# Altium PCB BuySellDisplay4.PcbDoc (part 2 of 3)
Units mm, origin at the board's own origin, x right, y up, seen from the top; angles counter-clockwise.
Board outline 355.85 x 151.13 mm, 2 copper layers (Top Layer, Bottom Layer); 219 components, 209 nets, 584 pads, 68 vias.
Unrouted connection lines stored in the file: 3.
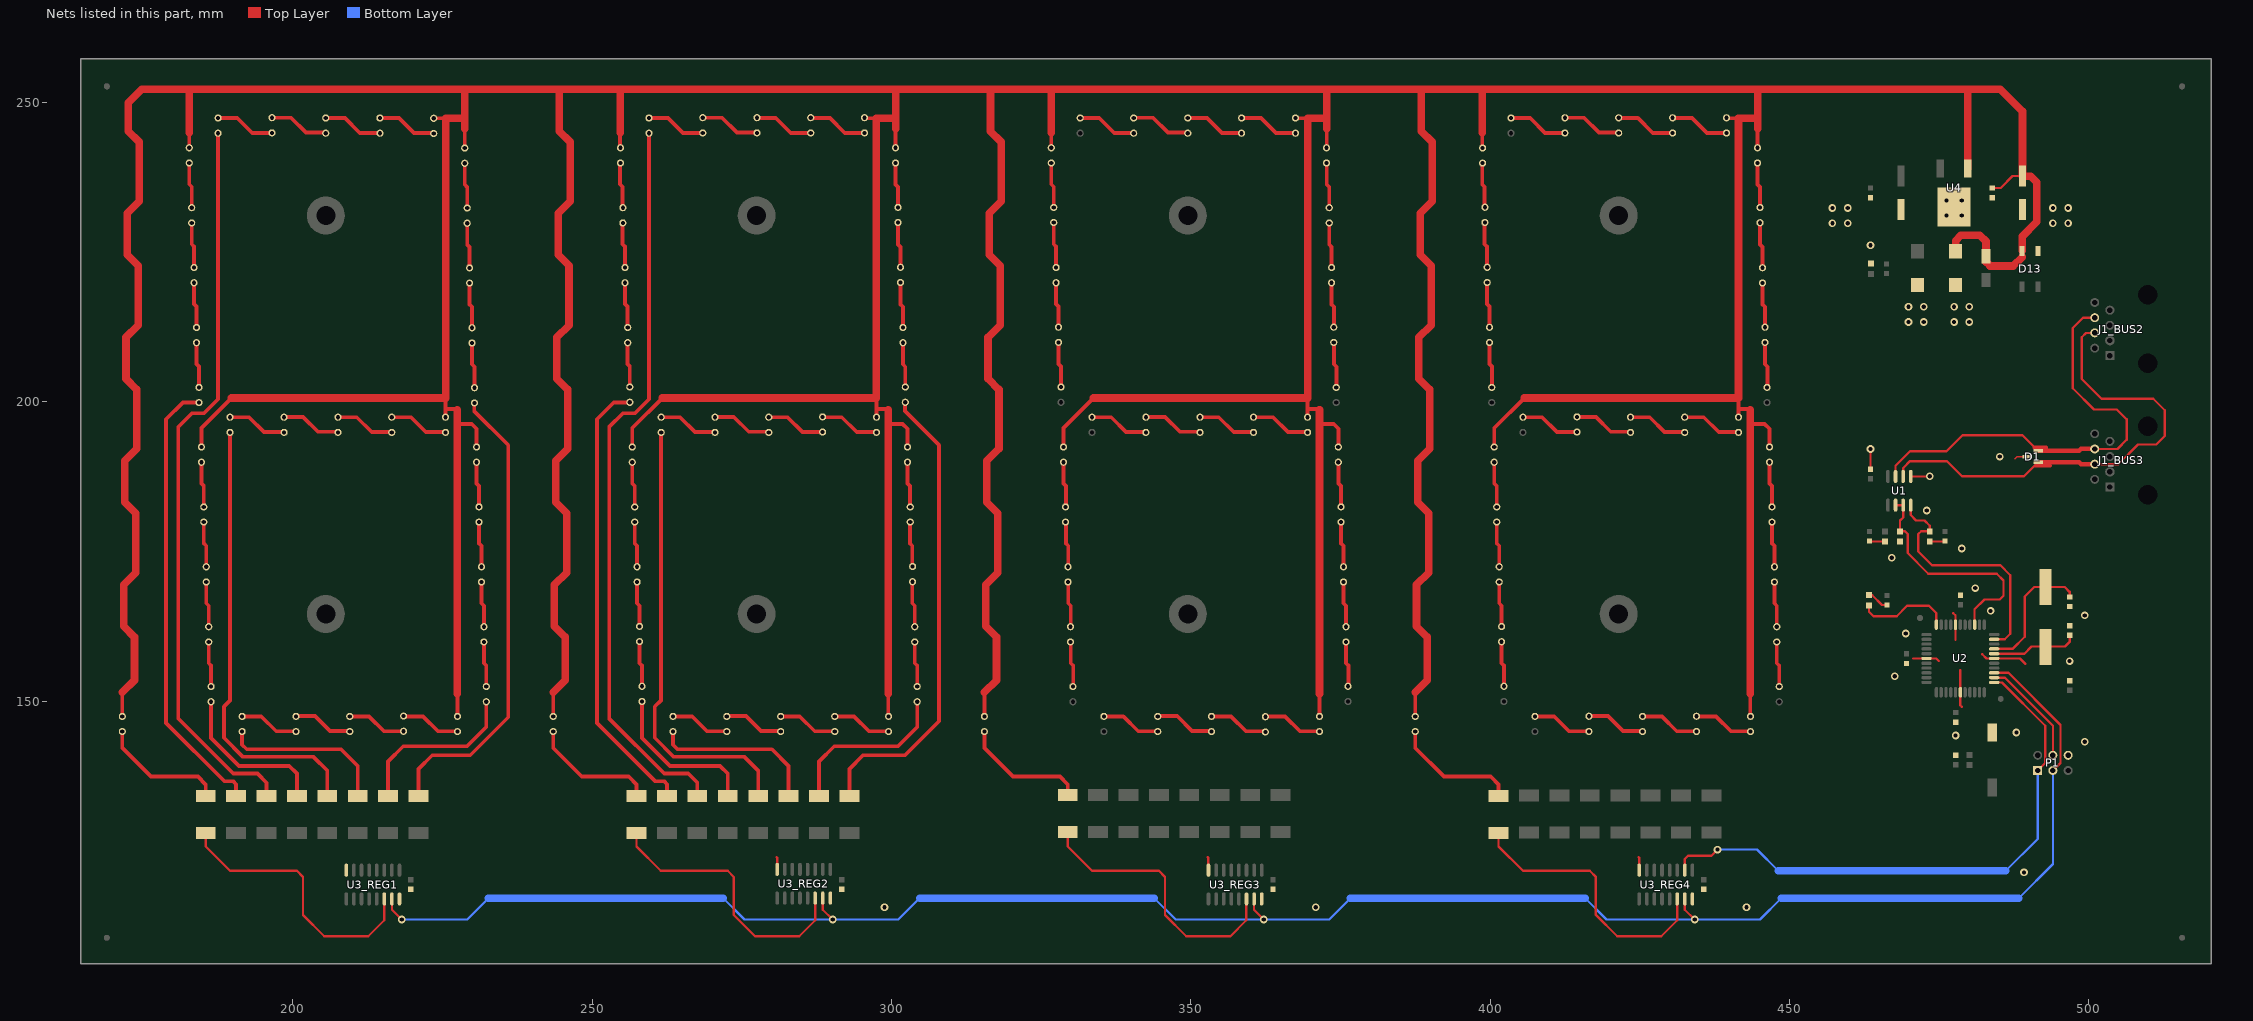
[diagram p2: the nets of this part, all layers, seen from the top]

## Part data
C1 C2 C4 C5 C6 C7 C9_REG1 C9_REG2 C9_REG3 C9_REG4 C12 C13: library part C0.1UF, "Capacitores cerámicos de capas múltiples (MLCC) - SMD/SMT 0603 0.1uF 16volts X7R 5%"
C3 C8: library part C18pF, "GJM0336C1E180JB01D"
C10: library part EEH-ZA1E101XP, "EEH-ZA1E101XP"
C11: library part 25SVPF47M, "25SVPF47M"
D1: library part SM712, "SM712"
D2 D3 D4 D14: library part 150060YS75000, "NPN General Purpose Amplifier"
D6_7SEG1 D6_7SEG2 D6_7SEG3 D6_7SEG4 D7_L1 D7_L2 D7_L3 D7_L4 D7_L5 D7_L6 D7_L7 D7_L8 D7_L9 D7_L10 D7_L11 D7_L12 D7_L13 D7_L14 D7_L15 D7_L16 D7_L17 D7_L18 D7_L19 D7_L20 D7_L21 D7_L22 D7_L23 D7_L24 D7_L25 D7_L26 D7_L27 D7_L28 D8_L1 D8_L2 D8_L3 D8_L4 D8_L5 D8_L6 D8_L7 D8_L8 D8_L9 D8_L10 D8_L11 D8_L12 D8_L13 D8_L14 D8_L15 D8_L16 D8_L17 D8_L18 D8_L19 D8_L20 D8_L21 D8_L22 D8_L23 D8_L24 D8_L25 D8_L26 D8_L27 D8_L28 D9_L1 D9_L2 D9_L3 D9_L4 D9_L5 D9_L6 D9_L7 D9_L8 D9_L9 D9_L10 D9_L11 D9_L12 D9_L13 D9_L14 D9_L15 D9_L16 D9_L17 D9_L18 D9_L19 D9_L20 D9_L21 D9_L22 D9_L23 D9_L24 D9_L25 D9_L26 D9_L27 D9_L28 D10_L1 D10_L2 D10_L3 D10_L4 D10_L5 D10_L6 D10_L7 D10_L8 D10_L9 D10_L10 D10_L11 D10_L12 D10_L13 D10_L14 D10_L15 D10_L16 D10_L17 D10_L18 D10_L19 D10_L20 D10_L21 D10_L22 D10_L23 D10_L24 D10_L25 D10_L26 D10_L27 D10_L28 D11_L1 D11_L2 D11_L3 D11_L4 D11_L5 D11_L6 D11_L7 D11_L8 D11_L9 D11_L10 D11_L11 D11_L12 D11_L13 D11_L14 D11_L15 D11_L16 D11_L17 D11_L18 D11_L19 D11_L20 D11_L21 D11_L22 D11_L23 D11_L24 D11_L25 D11_L26 D11_L27 D11_L28: library part HBLED, "HBLED"
D15: library part SMBJ12A-E3/52, "NPN General Purpose Amplifier"
D16: library part SMBJ5.0A, "NPN General Purpose Amplifier"
J1_BUS2 J1_BUS3: library part 15-43-6233, "Right Angle, Standard Profile, RJ45-Keyed, Flange Mount PCB Jack"
P1: library part "Header 6", "Header, 6-Pin"
R1 R2 R3 R4 R5 R8: library part RK73B1HTTC472J, "RK73B1HTTC472J"
R6_7SEG1 R6_7SEG2 R6_7SEG3 R6_7SEG4: library part CRCW2512470RJNEG, "CRCW2512470RJNEG"
R7_L1 R7_L2 R7_L3 R7_L4 R7_L5 R7_L6 R7_L7 R7_L8 R7_L9 R7_L10 R7_L11 R7_L12 R7_L13 R7_L14 R7_L15 R7_L16 R7_L17 R7_L18 R7_L19 R7_L20 R7_L21 R7_L22 R7_L23 R7_L24 R7_L25 R7_L26 R7_L27 R7_L28: library part CRCW2512120RJNEG, "CRCW2512120RJNEG"
S1: "Switch"
U1: "Low-Power, Slew-Rate-Limited RS-485/RS-422 Transceiver"
U2: "20 MHz 8-bit AVR Microcontroller with 128KB Flash, 44-Pin TQFP Pkg, Industrial Temp"
U3_REG1 U3_REG2 U3_REG3 U3_REG4: library part NPIC6C595, "Power logic 8-bit shift register; open-drain outputs"
Y1: "Crystal Oscillator"

## Free pads (board coordinates)
  round 6.35 hole 3.175: 0(205.486,164.592) 0(205.486,231.14) 0(277.47,164.592) 0(277.47,231.14) 0(349.504,164.592) 0(349.504,231.14) 0(421.488,164.592) 0(421.488,231.14)
  round 1 smd mask+1: 1(168.91,110.49) 1(168.91,252.73) 1(515.62,110.49) 1(515.62,252.73)
  round 1 smd far side mask+1: 1(168.91,110.49) 1(168.91,252.73) 1(515.62,110.49) 1(515.62,252.73)
  round 1 smd mask+0.75: 1(471.83,163.906) 1(485.318,150.393)

## Via types
v1: diameter 1.27, hole 0.711, Top Layer to Bottom Layer, 68 vias

## Nets (pads, with @x,y where several pads share a name; then routed paths per layer and width w, separated by ;. In a path a pad name is that pad's centre, name@x,y a point inside that pad or via, vN(x,y) a via of type N, cw(c..) or ccw(c..) an arc to the next point about the centre after c; other vN are vias at no path point)
20MHZ_1: C3.1 U2.8 Y1.2 | length 22
  Top Layer w0.381: U2.8@484.214,158.751 487.3,158.751 489.331,160.782 489.331,167.513 490.902,169.084 496.015,169.084 496.824,168.275 C3.1@496.824,167.424
20MHZ_2: C8.1 U2.7 Y1.1 | length 14.3
  Top Layer w0.381: U2.7@484.214,157.951 489.294,157.951 490.474,159.131 492.76,159.131 496.062,159.131 496.824,159.893 C8.1@496.824,160.744
A: D1.1 J1_BUS2.4 J1_BUS3.4 U1.6 | length 81.5
  Top Layer w0.381: U1.6@469.011,187.566 469.011,188.976 470.154,190.119 476.305,190.119 478.845,187.579 489.204,187.579 D1.1@491.556,189.931 ; J1_BUS2.4@500.706,211.541 499.577,211.541 498.856,210.82 498.856,203.835 502.158,200.533 510.794,200.533 512.699,198.628 512.699,194.31 511.302,192.913 508.254,192.913 504.952,189.611 J1_BUS3.4@500.962,189.611
  Top Layer w0.635: 491.109,189.357 493.522,189.357
  Top Layer w0.762: D1.1@491.556,189.931 498.41,189.931 498.73,189.611 J1_BUS3.4@500.962,189.611
B: D1.2 J1_BUS2.6 J1_BUS3.6 U1.7 | length 74.2
  Top Layer w0.381: U1.7@467.741,187.566 467.741,189.357 470.154,191.77 476.25,191.77 478.917,194.437 488.95,194.437 490.982,192.405 ; J1_BUS2.6@500.706,214.081 499.069,214.081 497.332,212.344 497.332,202.311 500.888,198.755 504.698,198.755 506.349,197.104 506.349,193.675 504.825,192.151 J1_BUS3.6@501.015,192.151
  Top Layer w0.635: 490.982,192.405 492.887,192.405
  Top Layer w0.762: D1.2@491.556,191.831 498.409,191.831 498.729,192.151 J1_BUS3.6@501.015,192.151
CLK: P1.3 U2.3 U3_REG1.15 U3_REG2.15 U3_REG3.15 U3_REG4.15 | length 343.4
  Top Layer w0.381: U3_REG1.15@216.535,116.98 216.535,115.189 v1(218.186,113.538) ; U3_REG2.15@288.519,116.98 288.519,115.189 v1(290.17,113.538) ; U3_REG3.15@360.553,116.98 360.553,115.189 v1(362.204,113.538) ; U3_REG4.15@432.537,116.98 432.537,115.189 v1(434.188,113.538) ; U2.3@484.214,154.751 486.599,154.751 495.3,146.05 495.3,139.7 P1.3@494.03,138.43
  Bottom Layer w0.381: v1(218.186,113.538) 229.108,113.538 232.664,117.094 ; 271.882,117.094 275.438,113.538 ; 275.488,113.538 301.142,113.538 304.698,117.094 ; 343.916,117.094 347.472,113.538 373.126,113.538 376.682,117.094 ; 415.9,117.094 419.456,113.538 445.11,113.538 448.666,117.094 ; 488.315,117.094 494.03,122.809 P1.3@494.03,138.43
  Bottom Layer w1.27: 232.664,117.094 271.882,117.094 ; 304.698,117.094 343.916,117.094 ; 376.682,117.094 415.9,117.094 ; 448.666,117.094 488.315,117.094
COM_485_EN: R1.1 U1.2 U1.3 U2.14 | length 39.3
  Top Layer w0.381: U1.2@467.741,182.766 U1.3@469.011,182.766 469.011,180.721 468.503,180.213 R1.1@468.503,178.396 469.304,178.396 469.773,177.927 469.773,174.752 473.202,171.323 484.632,171.323 485.775,170.18 485.775,167.64 485.14,167.005 482.6,167.005 480.949,165.354 U2.14@480.949,162.801
DI: R3.2 U1.4 U2.10 | length 41.4
  Top Layer w0.381: U1.4@470.281,182.766 470.281,181.102 471.17,180.213 472.567,180.213 473.456,179.324 R3.2@473.456,178.396 472.02,178.396 471.551,177.927 471.551,175.006 473.837,172.72 485.267,172.72 486.918,171.069 486.918,161.29 485.979,160.351 U2.10@484.214,160.351
DOT_7SEG1: R6_7SEG1.2 U3_REG1.14 | length 46.7
  Top Layer w0.381: R6_7SEG1.2@185.42,127.964 185.42,125.73 189.484,121.666 200.66,121.666 201.676,120.65 201.676,114.3 205.232,110.744 212.598,110.744 215.265,113.411 U3_REG1.14@215.265,116.98
DOT_7SEG2: R6_7SEG2.2 U3_REG2.14 | length 46.7
  Top Layer w0.381: R6_7SEG2.2@257.404,127.964 257.404,125.73 261.468,121.666 272.644,121.666 273.66,120.65 273.66,114.3 277.216,110.744 284.582,110.744 287.249,113.411 U3_REG2.14@287.249,116.98
DOT_7SEG3: R6_7SEG3.2 U3_REG3.14 | length 46.7
  Top Layer w0.381: R6_7SEG3.2@329.438,127.964 329.438,125.73 333.502,121.666 344.678,121.666 345.694,120.65 345.694,114.3 349.25,110.744 356.616,110.744 359.283,113.411 U3_REG3.14@359.283,116.98
DOT_7SEG4: R6_7SEG4.2 U3_REG4.14 | length 46.7
  Top Layer w0.381: R6_7SEG4.2@401.422,127.964 401.422,125.73 405.486,121.666 416.662,121.666 417.678,120.65 417.678,114.3 421.234,110.744 428.6,110.744 431.267,113.411 U3_REG4.14@431.267,116.98
EXTSUPP: C10.1 C12.1 D6_7SEG1.A D6_7SEG2.A D6_7SEG3.A D6_7SEG4.A D7_L1.A D7_L2.A D7_L3.A D7_L4.A D7_L5.A D7_L6.A D7_L7.A D7_L8.A D7_L9.A D7_L10.A D7_L11.A D7_L12.A D7_L13.A D7_L14.A D7_L15.A D7_L16.A D7_L17.A D7_L18.A D7_L19.A D7_L20.A D7_L21.A D7_L22.A D7_L23.A D7_L24.A D7_L25.A D7_L26.A D7_L27.A D7_L28.A D12.1 D13.4 D15.1 U4.1 | length 1561.9
  Top Layer w0.381: C12.1@483.87,235.75 485.305,235.75 487.299,237.744 C10.1@488.95,237.744
  Top Layer w0.635: D6_7SEG1.A@171.501,147.472 171.501,151.486 ; D7_L5.A@182.677,242.468 182.677,245.059 ; 182.677,251.511 183.388,252.222 ; D7_L3.A@184.709,192.481 184.709,195.631 189.738,200.66 ; D7_L7.A@223.52,247.396 225.552,247.396 ; D7_L4.A@225.501,197.46 225.501,202.032 ; 225.501,198.831 227.533,198.831 ; D7_L1.A@227.482,147.472 227.482,152.044 ; 227.482,196.342 229.87,196.342 230.683,195.529 D7_L2.A@230.683,192.481 ; D7_L6.A@228.702,242.418 228.702,245.618 ; D6_7SEG2.A@243.484,147.472 243.484,151.486 ; D7_L12.A@254.66,242.468 254.66,245.059 ; 254.66,251.511 255.372,252.222 ; D7_L10.A@256.692,192.481 256.692,195.631 261.722,200.66 ; D7_L14.A@295.504,247.396 297.536,247.396 ; D7_L11.A@297.485,197.46 297.485,202.032 ; 297.485,198.831 299.517,198.831 ; D7_L8.A@299.466,147.472 299.466,152.044 ; 299.466,196.342 301.854,196.342 302.666,195.529 D7_L9.A@302.666,192.481 ; D7_L13.A@300.685,242.418 300.685,245.618 ; D6_7SEG3.A@315.519,147.472 315.519,151.486 ; D7_L19.A@326.695,242.468 326.695,245.059 ; 326.695,251.511 327.406,252.222 ; D7_L17.A@328.727,192.481 328.727,195.631 333.756,200.66 ; D7_L21.A@367.538,247.396 369.57,247.396 ; D7_L18.A@369.519,197.46 369.519,202.032 ; 369.519,198.831 371.551,198.831 ; D7_L15.A@371.5,147.472 371.5,152.044 ; 371.5,196.342 373.888,196.342 374.701,195.529 D7_L16.A@374.701,192.481 ; D7_L20.A@372.72,242.418 372.72,245.618 ; D6_7SEG4.A@387.502,147.472 387.502,151.486 ; D7_L26.A@398.678,242.468 398.678,245.059 ; 398.678,251.511 399.39,252.222 ; D7_L24.A@400.71,192.481 400.71,195.631 405.74,200.66 ; D7_L28.A@439.522,247.396 441.554,247.396 ; D7_L25.A@441.503,197.46 441.503,202.032 ; 441.503,198.831 443.535,198.831 ; D7_L22.A@443.484,147.472 443.484,152.044 ; 443.484,196.342 445.872,196.342 446.684,195.529 D7_L23.A@446.684,192.481 ; D7_L27.A@444.703,242.418 444.703,245.618
  Top Layer w1.27: 171.501,151.486 173.533,153.518 173.533,160.731 171.704,162.56 171.704,169.469 173.736,171.501 173.736,181.407 171.907,183.236 171.907,190.144 173.939,192.176 173.939,202.082 172.11,203.911 172.11,210.82 174.142,212.852 174.142,222.758 172.314,224.587 172.314,231.496 174.346,233.528 174.346,243.434 172.517,245.262 172.517,249.987 174.752,252.222 485.267,252.222 488.95,248.539 C10.1@488.95,237.871 ; 182.677,245.008 182.677,251.511 ; 189.738,200.66 225.501,200.66 ; 225.501,200.762 225.501,247.396 228.651,247.396 ; 227.482,151.282 227.482,198.73 ; 228.702,245.618 228.702,252.222 ; 243.484,151.486 245.516,153.518 245.516,160.731 243.688,162.56 243.688,169.469 245.72,171.501 245.72,181.407 243.891,183.236 243.891,190.144 245.923,192.176 245.923,202.082 244.094,203.911 244.094,210.82 246.126,212.852 246.126,222.758 244.297,224.587 244.297,231.496 246.329,233.528 246.329,243.434 244.5,245.262 244.5,252.171 ; 254.66,245.008 254.66,251.511 ; 261.722,200.66 297.485,200.66 ; 297.485,200.762 297.485,247.396 300.634,247.396 ; 299.466,151.282 299.466,198.73 ; 300.685,245.618 300.685,252.222 ; 315.519,151.486 317.551,153.518 317.551,160.731 315.722,162.56 315.722,169.469 317.754,171.501 317.754,181.407 315.925,183.236 315.925,190.144 317.957,192.176 317.957,202.082 316.128,203.911 316.128,210.82 318.16,212.852 318.16,222.758 316.332,224.587 316.332,231.496 318.364,233.528 318.364,243.434 316.535,245.262 316.535,252.171 ; 326.695,245.008 326.695,251.511 ; 333.756,200.66 369.519,200.66 ; 369.519,200.762 369.519,247.396 372.669,247.396 ; 371.5,151.282 371.5,198.73 ; 372.72,245.618 372.72,252.222 ; 387.502,151.486 389.534,153.518 389.534,160.731 387.706,162.56 387.706,169.469 389.738,171.501 389.738,181.407 387.909,183.236 387.909,190.144 389.941,192.176 389.941,202.082 388.112,203.911 388.112,210.82 390.144,212.852 390.144,222.758 388.315,224.587 388.315,231.496 390.347,233.528 390.347,243.434 388.518,245.262 388.518,252.171 ; 398.678,245.008 398.678,251.511 ; 405.74,200.66 441.503,200.66 ; 441.503,200.762 441.503,247.396 444.652,247.396 ; 443.484,151.282 443.484,198.73 ; 444.703,245.618 444.703,252.222 ; D15.1@477.774,225.177 477.774,226.949 478.663,227.838 481.838,227.838 482.854,226.822 482.854,223.393 483.527,222.72 487.388,222.72 488.885,224.217 ; 479.806,251.714 U4.1@479.81,239 ; D13.4@488.885,225.25 488.885,227.646 491.363,230.124 491.363,236.728 490.347,237.744 C10.1@488.95,237.744
GND: C1.2 C2.2 C3.2 C4.2 C5.2 C6.2 C7.2 C8.2 C9_REG1.2 C9_REG2.2 C9_REG3.2 C9_REG4.2 C10.2 C11.2 C12.2 C13.2 D1.3 D13.3 D15.2 D16.2 P1.6 R1.2 R8.2 S1.2 U1.5 U2.6 U2.18 U2.28 U2.39 U3_REG1.8 U3_REG1.16 U3_REG2.8 U3_REG2.16 U3_REG3.8 U3_REG3.16 U3_REG4.8 U3_REG4.16 U4.4 | length 38.7
  Top Layer w0.254: 487.68,190.5 488.061,190.881 D1.3@489.756,190.881
  Top Layer w0.381: 280.797,123.952 280.899,123.85 U3_REG2.8@280.899,121.78 ; 352.831,123.952 352.933,123.85 U3_REG3.8@352.933,121.78 ; 424.815,123.952 424.917,123.85 U3_REG4.8@424.917,121.78 ; C1.2@463.55,188.76 v1(463.55,192.151) ; U1.5@470.281,187.566 v1@473.456,187.566 ; 470.662,157.151 474.547,157.151 474.98,156.718 ; 477.393,164.719 477.754,164.358 477.754,160.254 ; 478.564,155.194 478.564,149.324 478.79,149.098 ; 482.219,157.861 482.929,157.151 488.517,157.151 489.458,156.21
  other v1: 298.831,115.57 370.865,115.57 442.849,115.57 489.204,121.412 499.364,143.256 477.774,144.272 487.934,144.78 467.614,154.178 496.824,156.718 469.468,161.315 499.364,164.338 483.616,165.1 481.076,168.91 467.106,173.99 478.79,175.514 472.948,181.864 473.456,187.579 485.14,190.881 469.9,213.36 472.44,213.36 477.52,213.36 480.06,213.36 469.9,215.9 472.44,215.9 477.52,215.9 480.06,215.9 463.55,226.187 457.2,229.87 459.74,229.87 494.03,229.87 496.57,229.87 476.25,231.14 478.79,231.14 457.2,232.41 459.74,232.41 494.03,232.41 496.57,232.41 476.25,233.68 478.79,233.68
IND: R5.1 U2.22 | length 15.8
  Top Layer w0.381: R5.1@463.296,166.028 463.296,164.973 464.058,164.211 467.944,164.211 469.671,165.938 473.329,165.938 474.564,164.703 U2.22@474.564,162.801
INPUT: P1.1 U2.1 U3_REG4.2 | length 96.2
  Top Layer w0.381: U3_REG4.2@432.537,121.78 432.537,123.658 433.084,124.206 436.982,124.206 v1(437.998,125.222) ; U2.1@484.214,153.151 485.532,153.151 492.76,145.923 492.76,139.7 P1.1@491.49,138.43
  Bottom Layer w0.381: v1(437.998,125.222) 444.602,125.222 448.158,121.666 ; 486.156,121.666 491.49,127 P1.1@491.49,138.43
  Bottom Layer w1.27: 448.158,121.666 486.156,121.666
MISO: P1.4 U2.2 | length 18.1
  Top Layer w0.381: U2.2@484.214,153.951 486.002,153.951 494.03,145.923 P1.4@494.03,140.97
NetD2_1: D2.1 R2.1 | length 2.5
  Top Layer w0.381: D2.1@463.473,176.696 R2.1@465.963,176.696
NetD3_1: D3.1 R3.1 | length 2.5
  Top Layer w0.381: R3.1@473.456,176.696 D3.1@475.946,176.696
NetD4_1: D4.1 R5.2 | length 3.7
  Top Layer w0.381: R5.2@463.296,167.728 463.843,167.728 465.493,166.078 D4.1@466.344,166.078
NetD6_7SEG1_K: D6_7SEG1.K R6_7SEG1.1 | length 21.1
  Top Layer w0.635: D6_7SEG1.K@171.501,144.932 171.501,142.189 176.276,137.414 184.125,137.414 185.42,136.119 R6_7SEG1.1@185.42,134.164
NetD6_7SEG2_K: D6_7SEG2.K R6_7SEG2.1 | length 21.1
  Top Layer w0.635: D6_7SEG2.K@243.484,144.932 243.484,142.189 248.26,137.414 256.108,137.414 257.404,136.119 R6_7SEG2.1@257.404,134.164
NetD6_7SEG3_K: D6_7SEG3.K R6_7SEG3.1 | length 21.1
  Top Layer w0.635: D6_7SEG3.K@315.519,144.932 315.519,142.189 320.294,137.414 328.143,137.414 329.438,136.119 R6_7SEG3.1@329.438,134.164
NetD6_7SEG4_K: D6_7SEG4.K R6_7SEG4.1 | length 21.1
  Top Layer w0.635: D6_7SEG4.K@387.502,144.932 387.502,142.189 392.278,137.414 400.126,137.414 401.422,136.119 R6_7SEG4.1@401.422,134.164
NetD7_L1_K: D7_L1.K D8_L1.A | length 10
  Top Layer w0.635: D8_L1.A@218.542,147.472 221.742,147.472 224.231,144.983 D7_L1.K@227.533,144.983
NetD7_L2_K: D7_L2.K D8_L2.A | length 7.6
  Top Layer w0.635: D7_L2.K@230.683,189.941 230.683,186.385 231.089,185.979 D8_L2.A@231.089,182.474
NetD7_L3_K: D7_L3.K D8_L3.A | length 7.6
  Top Layer w0.635: D7_L3.K@184.709,189.941 184.709,186.385 185.115,185.979 D8_L3.A@185.115,182.474
NetD7_L4_K: D7_L4.K D8_L4.A | length 10
  Top Layer w0.635: D8_L4.A@216.51,197.46 219.71,197.46 222.199,194.97 D7_L4.K@225.501,194.97
NetD7_L5_K: D7_L5.K D8_L5.A | length 7.6
  Top Layer w0.635: D7_L5.K@182.677,239.928 182.677,236.372 183.083,235.966 D8_L5.A@183.083,232.461
NetD7_L6_K: D7_L6.K D8_L6.A | length 7.6
  Top Layer w0.635: D7_L6.K@228.702,239.878 228.702,236.322 229.108,235.915 D8_L6.A@229.108,232.41
NetD7_L7_K: D7_L7.K D8_L7.A | length 10
  Top Layer w0.635: D8_L7.A@214.528,247.447 217.729,247.447 220.218,244.958 D7_L7.K@223.52,244.958
NetD7_L8_K: D7_L8.K D8_L8.A | length 10
  Top Layer w0.635: D8_L8.A@290.525,147.472 293.726,147.472 296.215,144.983 D7_L8.K@299.517,144.983
NetD7_L9_K: D7_L9.K D8_L9.A | length 7.6
  Top Layer w0.635: D7_L9.K@302.666,189.941 302.666,186.385 303.073,185.979 D8_L9.A@303.073,182.474
NetD7_L10_K: D7_L10.K D8_L10.A | length 7.6
  Top Layer w0.635: D7_L10.K@256.692,189.941 256.692,186.385 257.099,185.979 D8_L10.A@257.099,182.474
NetD7_L11_K: D7_L11.K D8_L11.A | length 10
  Top Layer w0.635: D8_L11.A@288.493,197.46 291.694,197.46 294.183,194.97 D7_L11.K@297.485,194.97
NetD7_L12_K: D7_L12.K D8_L12.A | length 7.6
  Top Layer w0.635: D7_L12.K@254.66,239.928 254.66,236.372 255.067,235.966 D8_L12.A@255.067,232.461
NetD7_L13_K: D7_L13.K D8_L13.A | length 7.6
  Top Layer w0.635: D7_L13.K@300.685,239.878 300.685,236.322 301.092,235.915 D8_L13.A@301.092,232.41
NetD7_L14_K: D7_L14.K D8_L14.A | length 10
  Top Layer w0.635: D8_L14.A@286.512,247.447 289.712,247.447 292.202,244.958 D7_L14.K@295.504,244.958
NetD7_L15_K: D7_L15.K D8_L15.A | length 10
  Top Layer w0.635: D8_L15.A@362.56,147.472 365.76,147.472 368.249,144.983 D7_L15.K@371.551,144.983
NetD7_L16_K: D7_L16.K D8_L16.A | length 7.6
  Top Layer w0.635: D7_L16.K@374.701,189.941 374.701,186.385 375.107,185.979 D8_L16.A@375.107,182.474
NetD7_L17_K: D7_L17.K D8_L17.A | length 7.6
  Top Layer w0.635: D7_L17.K@328.727,189.941 328.727,186.385 329.133,185.979 D8_L17.A@329.133,182.474
NetD7_L18_K: D7_L18.K D8_L18.A | length 10
  Top Layer w0.635: D8_L18.A@360.528,197.46 363.728,197.46 366.217,194.97 D7_L18.K@369.519,194.97
NetD7_L19_K: D7_L19.K D8_L19.A | length 7.6
  Top Layer w0.635: D7_L19.K@326.695,239.928 326.695,236.372 327.101,235.966 D8_L19.A@327.101,232.461
NetD7_L20_K: D7_L20.K D8_L20.A | length 7.6
  Top Layer w0.635: D7_L20.K@372.72,239.878 372.72,236.322 373.126,235.915 D8_L20.A@373.126,232.41
NetD7_L21_K: D7_L21.K D8_L21.A | length 10
  Top Layer w0.635: D8_L21.A@358.546,247.447 361.747,247.447 364.236,244.958 D7_L21.K@367.538,244.958
NetD7_L22_K: D7_L22.K D8_L22.A | length 10
  Top Layer w0.635: D8_L22.A@434.543,147.472 437.744,147.472 440.233,144.983 D7_L22.K@443.535,144.983
NetD7_L23_K: D7_L23.K D8_L23.A | length 7.6
  Top Layer w0.635: D7_L23.K@446.684,189.941 446.684,186.385 447.091,185.979 D8_L23.A@447.091,182.474
NetD7_L24_K: D7_L24.K D8_L24.A | length 7.6
  Top Layer w0.635: D7_L24.K@400.71,189.941 400.71,186.385 401.117,185.979 D8_L24.A@401.117,182.474
NetD7_L25_K: D7_L25.K D8_L25.A | length 10
  Top Layer w0.635: D8_L25.A@432.511,197.46 435.712,197.46 438.201,194.97 D7_L25.K@441.503,194.97
NetD7_L26_K: D7_L26.K D8_L26.A | length 7.6
  Top Layer w0.635: D7_L26.K@398.678,239.928 398.678,236.372 399.085,235.966 D8_L26.A@399.085,232.461
NetD7_L27_K: D7_L27.K D8_L27.A | length 7.6
  Top Layer w0.635: D7_L27.K@444.703,239.878 444.703,236.322 445.11,235.915 D8_L27.A@445.11,232.41
NetD7_L28_K: D7_L28.K D8_L28.A | length 10
  Top Layer w0.635: D8_L28.A@430.53,247.447 433.73,247.447 436.22,244.958 D7_L28.K@439.522,244.958
NetD8_L1_K: D8_L1.K D9_L1.A | length 10
  Top Layer w0.635: D9_L1.A@209.499,147.472 212.7,147.472 215.189,144.983 D8_L1.K@218.491,144.983
NetD8_L2_K: D8_L2.K D9_L2.A | length 7.6
  Top Layer w0.635: D8_L2.K@231.089,179.934 231.089,176.378 231.496,175.971 D9_L2.A@231.496,172.466
NetD8_L3_K: D8_L3.K D9_L3.A | length 7.6
  Top Layer w0.635: D8_L3.K@185.115,179.934 185.115,176.378 185.522,175.971 D9_L3.A@185.522,172.466
NetD8_L4_K: D8_L4.K D9_L4.A | length 10
  Top Layer w0.635: D9_L4.A@207.467,197.46 210.668,197.46 213.157,194.97 D8_L4.K@216.459,194.97
NetD8_L5_K: D8_L5.K D9_L5.A | length 7.6
  Top Layer w0.635: D8_L5.K@183.083,229.921 183.083,226.365 183.49,225.958 D9_L5.A@183.49,222.453
NetD8_L6_K: D8_L6.K D9_L6.A | length 7.6
  Top Layer w0.635: D8_L6.K@229.108,229.87 229.108,226.314 229.514,225.908 D9_L6.A@229.514,222.402
NetD8_L7_K: D8_L7.K D9_L7.A | length 10
  Top Layer w0.635: D9_L7.A@205.486,247.447 208.686,247.447 211.176,244.958 D8_L7.K@214.478,244.958
NetD8_L8_K: D8_L8.K D9_L8.A | length 10
  Top Layer w0.635: D9_L8.A@281.483,147.472 284.683,147.472 287.172,144.983 D8_L8.K@290.474,144.983
NetD8_L9_K: D8_L9.K D9_L9.A | length 7.6
  Top Layer w0.635: D8_L9.K@303.073,179.934 303.073,176.378 303.479,175.971 D9_L9.A@303.479,172.466
NetD8_L10_K: D8_L10.K D9_L10.A | length 7.6
  Top Layer w0.635: D8_L10.K@257.099,179.934 257.099,176.378 257.505,175.971 D9_L10.A@257.505,172.466
NetD8_L11_K: D8_L11.K D9_L11.A | length 10
  Top Layer w0.635: D9_L11.A@279.451,197.46 282.651,197.46 285.14,194.97 D8_L11.K@288.442,194.97
NetD8_L12_K: D8_L12.K D9_L12.A | length 7.6
  Top Layer w0.635: D8_L12.K@255.067,229.921 255.067,226.365 255.473,225.958 D9_L12.A@255.473,222.453
NetD8_L13_K: D8_L13.K D9_L13.A | length 7.6
  Top Layer w0.635: D8_L13.K@301.092,229.87 301.092,226.314 301.498,225.908 D9_L13.A@301.498,222.402
NetD8_L14_K: D8_L14.K D9_L14.A | length 10
  Top Layer w0.635: D9_L14.A@277.47,247.447 280.67,247.447 283.159,244.958 D8_L14.K@286.461,244.958
NetD8_L15_K: D8_L15.K D9_L15.A | length 10
  Top Layer w0.635: D9_L15.A@353.517,147.472 356.718,147.472 359.207,144.983 D8_L15.K@362.509,144.983
NetD8_L16_K: D8_L16.K D9_L16.A | length 7.6
  Top Layer w0.635: D8_L16.K@375.107,179.934 375.107,176.378 375.514,175.971 D9_L16.A@375.514,172.466
NetD8_L17_K: D8_L17.K D9_L17.A | length 7.6
  Top Layer w0.635: D8_L17.K@329.133,179.934 329.133,176.378 329.54,175.971 D9_L17.A@329.54,172.466
NetD8_L18_K: D8_L18.K D9_L18.A | length 10
  Top Layer w0.635: D9_L18.A@351.485,197.46 354.686,197.46 357.175,194.97 D8_L18.K@360.477,194.97
NetD8_L19_K: D8_L19.K D9_L19.A | length 7.6
  Top Layer w0.635: D8_L19.K@327.101,229.921 327.101,226.365 327.508,225.958 D9_L19.A@327.508,222.453
NetD8_L20_K: D8_L20.K D9_L20.A | length 7.6
  Top Layer w0.635: D8_L20.K@373.126,229.87 373.126,226.314 373.532,225.908 D9_L20.A@373.532,222.402
NetD8_L21_K: D8_L21.K D9_L21.A | length 10
  Top Layer w0.635: D9_L21.A@349.504,247.447 352.704,247.447 355.194,244.958 D8_L21.K@358.496,244.958
NetD8_L22_K: D8_L22.K D9_L22.A | length 10
  Top Layer w0.635: D9_L22.A@425.501,147.472 428.701,147.472 431.19,144.983 D8_L22.K@434.492,144.983
NetD8_L23_K: D8_L23.K D9_L23.A | length 7.6
  Top Layer w0.635: D8_L23.K@447.091,179.934 447.091,176.378 447.497,175.971 D9_L23.A@447.497,172.466
NetD8_L24_K: D8_L24.K D9_L24.A | length 7.6
  Top Layer w0.635: D8_L24.K@401.117,179.934 401.117,176.378 401.523,175.971 D9_L24.A@401.523,172.466
NetD8_L25_K: D8_L25.K D9_L25.A | length 10
  Top Layer w0.635: D9_L25.A@423.469,197.46 426.669,197.46 429.158,194.97 D8_L25.K@432.46,194.97
NetD8_L26_K: D8_L26.K D9_L26.A | length 7.6
  Top Layer w0.635: D8_L26.K@399.085,229.921 399.085,226.365 399.491,225.958 D9_L26.A@399.491,222.453
NetD8_L27_K: D8_L27.K D9_L27.A | length 7.6
  Top Layer w0.635: D8_L27.K@445.11,229.87 445.11,226.314 445.516,225.908 D9_L27.A@445.516,222.402
NetD8_L28_K: D8_L28.K D9_L28.A | length 10
  Top Layer w0.635: D9_L28.A@421.488,247.447 424.688,247.447 427.177,244.958 D8_L28.K@430.479,244.958
NetD9_L1_K: D9_L1.K D10_L1.A | length 10
  Top Layer w0.635: D10_L1.A@200.508,147.523 203.708,147.523 206.197,145.034 D9_L1.K@209.499,145.034
NetD9_L2_K: D9_L2.K D10_L2.A | length 7.6
  Top Layer w0.635: D9_L2.K@231.496,169.926 231.496,166.37 231.902,165.964 D10_L2.A@231.902,162.458
NetD9_L3_K: D9_L3.K D10_L3.A | length 7.6
  Top Layer w0.635: D9_L3.K@185.522,169.926 185.522,166.37 185.928,165.964 D10_L3.A@185.928,162.458
NetD9_L4_K: D9_L4.K D10_L4.A | length 10
  Top Layer w0.635: D10_L4.A@198.476,197.51 201.676,197.51 204.165,195.021 D9_L4.K@207.467,195.021
NetD9_L5_K: D9_L5.K D10_L5.A | length 7.6
  Top Layer w0.635: D9_L5.K@183.49,219.913 183.49,216.357 183.896,215.951 D10_L5.A@183.896,212.446
NetD9_L6_K: D9_L6.K D10_L6.A | length 7.6
  Top Layer w0.635: D9_L6.K@229.514,219.862 229.514,216.306 229.921,215.9 D10_L6.A@229.921,212.395
NetD9_L7_K: D9_L7.K D10_L7.A | length 10
  Top Layer w0.635: D10_L7.A@196.494,247.498 199.695,247.498 202.184,245.008 D9_L7.K@205.486,245.008
NetD9_L8_K: D9_L8.K D10_L8.A | length 10
  Top Layer w0.635: D10_L8.A@272.491,147.523 275.692,147.523 278.181,145.034 D9_L8.K@281.483,145.034
NetD9_L9_K: D9_L9.K D10_L9.A | length 7.6
  Top Layer w0.635: D9_L9.K@303.479,169.926 303.479,166.37 303.886,165.964 D10_L9.A@303.886,162.458
NetD9_L10_K: D9_L10.K D10_L10.A | length 7.6
  Top Layer w0.635: D9_L10.K@257.505,169.926 257.505,166.37 257.912,165.964 D10_L10.A@257.912,162.458
NetD9_L11_K: D9_L11.K D10_L11.A | length 10
  Top Layer w0.635: D10_L11.A@270.459,197.51 273.66,197.51 276.149,195.021 D9_L11.K@279.451,195.021
NetD9_L12_K: D9_L12.K D10_L12.A | length 7.6
  Top Layer w0.635: D9_L12.K@255.473,219.913 255.473,216.357 255.88,215.951 D10_L12.A@255.88,212.446
NetD9_L13_K: D9_L13.K D10_L13.A | length 7.6
  Top Layer w0.635: D9_L13.K@301.498,219.862 301.498,216.306 301.904,215.9 D10_L13.A@301.904,212.395
NetD9_L14_K: D9_L14.K D10_L14.A | length 10
  Top Layer w0.635: D10_L14.A@268.478,247.498 271.678,247.498 274.168,245.008 D9_L14.K@277.47,245.008
NetD9_L15_K: D9_L15.K D10_L15.A | length 10
  Top Layer w0.635: D10_L15.A@344.526,147.523 347.726,147.523 350.215,145.034 D9_L15.K@353.517,145.034
NetD9_L16_K: D9_L16.K D10_L16.A | length 7.6
  Top Layer w0.635: D9_L16.K@375.514,169.926 375.514,166.37 375.92,165.964 D10_L16.A@375.92,162.458
NetD9_L17_K: D9_L17.K D10_L17.A | length 7.6
  Top Layer w0.635: D9_L17.K@329.54,169.926 329.54,166.37 329.946,165.964 D10_L17.A@329.946,162.458
NetD9_L18_K: D9_L18.K D10_L18.A | length 10
  Top Layer w0.635: D10_L18.A@342.494,197.51 345.694,197.51 348.183,195.021 D9_L18.K@351.485,195.021
NetD9_L19_K: D9_L19.K D10_L19.A | length 7.6
  Top Layer w0.635: D9_L19.K@327.508,219.913 327.508,216.357 327.914,215.951 D10_L19.A@327.914,212.446
NetD9_L20_K: D9_L20.K D10_L20.A | length 7.6
  Top Layer w0.635: D9_L20.K@373.532,219.862 373.532,216.306 373.939,215.9 D10_L20.A@373.939,212.395
NetD9_L21_K: D9_L21.K D10_L21.A | length 10
  Top Layer w0.635: D10_L21.A@340.512,247.498 343.713,247.498 346.202,245.008 D9_L21.K@349.504,245.008
NetD9_L22_K: D9_L22.K D10_L22.A | length 10
  Top Layer w0.635: D10_L22.A@416.509,147.523 419.71,147.523 422.199,145.034 D9_L22.K@425.501,145.034
NetD9_L23_K: D9_L23.K D10_L23.A | length 7.6
  Top Layer w0.635: D9_L23.K@447.497,169.926 447.497,166.37 447.904,165.964 D10_L23.A@447.904,162.458
NetD9_L24_K: D9_L24.K D10_L24.A | length 7.6
  Top Layer w0.635: D9_L24.K@401.523,169.926 401.523,166.37 401.93,165.964 D10_L24.A@401.93,162.458
NetD9_L25_K: D9_L25.K D10_L25.A | length 10
  Top Layer w0.635: D10_L25.A@414.477,197.51 417.678,197.51 420.167,195.021 D9_L25.K@423.469,195.021
NetD9_L26_K: D9_L26.K D10_L26.A | length 7.6
  Top Layer w0.635: D9_L26.K@399.491,219.913 399.491,216.357 399.898,215.951 D10_L26.A@399.898,212.446
NetD9_L27_K: D9_L27.K D10_L27.A | length 7.6
  Top Layer w0.635: D9_L27.K@445.516,219.862 445.516,216.306 445.922,215.9 D10_L27.A@445.922,212.395
NetD9_L28_K: D9_L28.K D10_L28.A | length 10
  Top Layer w0.635: D10_L28.A@412.496,247.498 415.696,247.498 418.186,245.008 D9_L28.K@421.488,245.008
NetD10_L1_K: D10_L1.K D11_L1.A | length 10
  Top Layer w0.635: D11_L1.A@191.516,147.472 194.716,147.472 197.206,144.983 D10_L1.K@200.508,144.983
NetD10_L2_K: D10_L2.K D11_L2.A | length 7.6
  Top Layer w0.635: D10_L2.K@231.902,159.918 231.902,156.362 232.308,155.956 D11_L2.A@232.308,152.451
NetD10_L3_K: D10_L3.K D11_L3.A | length 7.6
  Top Layer w0.635: D10_L3.K@185.928,159.918 185.928,156.362 186.334,155.956 D11_L3.A@186.334,152.451
NetD10_L4_K: D10_L4.K D11_L4.A | length 10
  Top Layer w0.635: D11_L4.A@189.484,197.46 192.684,197.46 195.174,194.97 D10_L4.K@198.476,194.97
NetD10_L5_K: D10_L5.K D11_L5.A | length 7.6
  Top Layer w0.635: D10_L5.K@183.896,209.906 183.896,206.35 184.302,205.943 D11_L5.A@184.302,202.438
NetD10_L6_K: D10_L6.K D11_L6.A | length 7.6
  Top Layer w0.635: D10_L6.K@229.921,209.855 229.921,206.299 230.327,205.892 D11_L6.A@230.327,202.387
NetD10_L7_K: D10_L7.K D11_L7.A | length 10
  Top Layer w0.635: D11_L7.A@187.503,247.447 190.703,247.447 193.192,244.958 D10_L7.K@196.494,244.958
NetD10_L8_K: D10_L8.K D11_L8.A | length 10
  Top Layer w0.635: D11_L8.A@263.5,147.472 266.7,147.472 269.189,144.983 D10_L8.K@272.491,144.983
NetD10_L9_K: D10_L9.K D11_L9.A | length 7.6
  Top Layer w0.635: D10_L9.K@303.886,159.918 303.886,156.362 304.292,155.956 D11_L9.A@304.292,152.451
NetD10_L10_K: D10_L10.K D11_L10.A | length 7.6
  Top Layer w0.635: D10_L10.K@257.912,159.918 257.912,156.362 258.318,155.956 D11_L10.A@258.318,152.451
NetD10_L11_K: D10_L11.K D11_L11.A | length 10
  Top Layer w0.635: D11_L11.A@261.468,197.46 264.668,197.46 267.157,194.97 D10_L11.K@270.459,194.97
NetD10_L12_K: D10_L12.K D11_L12.A | length 7.6
  Top Layer w0.635: D10_L12.K@255.88,209.906 255.88,206.35 256.286,205.943 D11_L12.A@256.286,202.438
NetD10_L13_K: D10_L13.K D11_L13.A | length 7.6
  Top Layer w0.635: D10_L13.K@301.904,209.855 301.904,206.299 302.311,205.892 D11_L13.A@302.311,202.387
NetD10_L14_K: D10_L14.K D11_L14.A | length 10
  Top Layer w0.635: D11_L14.A@259.486,247.421 D11_L14.A@259.486,247.447 262.687,247.447 265.176,244.958 D10_L14.K@268.478,244.958
NetD10_L15_K: D10_L15.K D11_L15.A | length 10
  Top Layer w0.635: D11_L15.A@335.534,147.472 338.734,147.472 341.224,144.983 D10_L15.K@344.526,144.983
NetD10_L16_K: D10_L16.K D11_L16.A | length 7.6
  Top Layer w0.635: D10_L16.K@375.92,159.918 375.92,156.362 376.326,155.956 D11_L16.A@376.326,152.451
NetD10_L17_K: D10_L17.K D11_L17.A | length 7.6
  Top Layer w0.635: D10_L17.K@329.946,159.918 329.946,156.362 330.352,155.956 D11_L17.A@330.352,152.451
NetD10_L18_K: D10_L18.K D11_L18.A | length 10
  Top Layer w0.635: D11_L18.A@333.502,197.46 336.702,197.46 339.192,194.97 D10_L18.K@342.494,194.97
NetD10_L19_K: D10_L19.K D11_L19.A | length 7.6
  Top Layer w0.635: D10_L19.K@327.914,209.906 327.914,206.35 328.32,205.943 D11_L19.A@328.32,202.438
NetD10_L20_K: D10_L20.K D11_L20.A | length 7.6
  Top Layer w0.635: D10_L20.K@373.939,209.855 373.939,206.299 374.345,205.892 D11_L20.A@374.345,202.387
NetD10_L21_K: D10_L21.K D11_L21.A | length 10
  Top Layer w0.635: D11_L21.A@331.521,247.421 D11_L21.A@331.521,247.447 334.721,247.447 337.21,244.958 D10_L21.K@340.512,244.958
NetD10_L22_K: D10_L22.K D11_L22.A | length 10
  Top Layer w0.635: D11_L22.A@407.518,147.472 410.718,147.472 413.207,144.983 D10_L22.K@416.509,144.983
NetD10_L23_K: D10_L23.K D11_L23.A | length 7.6
  Top Layer w0.635: D10_L23.K@447.904,159.918 447.904,156.362 448.31,155.956 D11_L23.A@448.31,152.451
NetD10_L24_K: D10_L24.K D11_L24.A | length 7.6
  Top Layer w0.635: D10_L24.K@401.93,159.918 401.93,156.362 402.336,155.956 D11_L24.A@402.336,152.451
NetD10_L25_K: D10_L25.K D11_L25.A | length 10
  Top Layer w0.635: D11_L25.A@405.486,197.46 408.686,197.46 411.175,194.97 D10_L25.K@414.477,194.97
NetD10_L26_K: D10_L26.K D11_L26.A | length 7.6
  Top Layer w0.635: D10_L26.K@399.898,209.906 399.898,206.35 400.304,205.943 D11_L26.A@400.304,202.438
NetD10_L27_K: D10_L27.K D11_L27.A | length 7.6
  Top Layer w0.635: D10_L27.K@445.922,209.855 445.922,206.299 446.329,205.892 D11_L27.A@446.329,202.387
NetD10_L28_K: D10_L28.K D11_L28.A | length 10
  Top Layer w0.635: D11_L28.A@403.504,247.421 D11_L28.A@403.504,247.447 406.705,247.447 409.194,244.958 D10_L28.K@412.496,244.958
NetD11_L1_K: D11_L1.K R7_L1.1 | length 28
  Top Layer w0.635: D11_L1.K@191.516,144.932 191.516,142.748 192.278,141.986 208.026,141.986 210.82,139.192 R7_L1.1@210.82,134.164
NetD11_L2_K: D11_L2.K R7_L2.1 | length 28.8
  Top Layer w0.635: R7_L2.1@215.9,134.164 215.9,139.954 218.44,142.494 229.108,142.494 232.308,145.694 D11_L2.K@232.308,149.911
NetD11_L3_K: D11_L3.K R7_L3.1 | length 26.6
  Top Layer w0.635: D11_L3.K@186.334,149.911 186.334,143.866 191.008,139.192 199.39,139.192 200.66,137.922 R7_L3.1@200.66,134.164
NetD11_L4_K: D11_L4.K R7_L4.1 | length 75.2
  Top Layer w0.635: D11_L4.K@189.484,194.92 189.484,150.114 188.468,149.098 188.468,143.891 191.643,140.716 203.454,140.716 205.74,138.43 R7_L4.1@205.74,134.164
NetD11_L5_K: D11_L5.K R7_L5.1 | length 75.3
  Top Layer w0.635: D11_L5.K@184.302,199.898 181.61,199.898 178.816,197.104 178.816,146.355 188.519,136.652 189.992,136.652 190.5,136.144 R7_L5.1@190.5,134.164
NetD11_L6_K: D11_L6.K R7_L6.1 | length 78
  Top Layer w0.635: R7_L6.1@220.98,134.164 220.98,138.684 223.266,140.97 229.616,140.97 235.966,147.32 235.966,192.786 230.276,198.476 D11_L6.K@230.276,199.898
NetD11_L7_K: D11_L7.K R7_L7.1 | length 123.1
  Top Layer w0.635: D11_L7.K@187.503,244.907 187.503,200.457 185.166,198.12 183.134,198.12 180.848,195.834 180.848,147.117 190.043,137.922 194.056,137.922 195.58,136.398 R7_L7.1@195.58,134.164
NetD11_L8_K: D11_L8.K R7_L8.1 | length 28
  Top Layer w0.635: D11_L8.K@263.5,144.932 263.5,142.748 264.262,141.986 280.01,141.986 282.804,139.192 R7_L8.1@282.804,134.164
NetD11_L9_K: D11_L9.K R7_L9.1 | length 28.8
  Top Layer w0.635: R7_L9.1@287.884,134.164 287.884,139.954 290.424,142.494 301.092,142.494 304.292,145.694 D11_L9.K@304.292,149.911
NetD11_L10_K: D11_L10.K R7_L10.1 | length 26.6
  Top Layer w0.635: D11_L10.K@258.318,149.911 258.318,143.866 262.992,139.192 271.374,139.192 272.644,137.922 R7_L10.1@272.644,134.164
NetD11_L11_K: D11_L11.K R7_L11.1 | length 75.2
  Top Layer w0.635: D11_L11.K@261.468,194.92 261.468,150.114 260.452,149.098 260.452,143.891 263.627,140.716 275.438,140.716 277.724,138.43 R7_L11.1@277.724,134.164
NetD11_L12_K: D11_L12.K R7_L12.1 | length 75.3
  Top Layer w0.635: D11_L12.K@256.286,199.898 253.594,199.898 250.8,197.104 250.8,146.355 260.502,136.652 261.976,136.652 262.484,136.144 R7_L12.1@262.484,134.164
NetD11_L13_K: D11_L13.K R7_L13.1 | length 78.4
  Top Layer w0.635: R7_L13.1@292.964,134.164 292.964,138.684 295.25,140.97 302.26,140.97 307.95,146.66 307.95,192.786 302.26,198.476 D11_L13.K@302.26,199.898
NetD11_L14_K: D11_L14.K R7_L14.1 | length 123.1
  Top Layer w0.635: D11_L14.K@259.486,244.907 259.486,200.457 257.15,198.12 255.118,198.12 252.832,195.834 252.832,147.117 262.026,137.922 266.04,137.922 267.564,136.398 R7_L14.1@267.564,134.164